# Altium PCB phoenix-c1.PcbDoc (part 2 of 3)
Units mm, origin at the board's own origin, x right, y up, seen from the top; angles counter-clockwise.
Board outline 40 x 40 mm, 4 copper layers (Top Layer, Layer 1, Layer 2, Bottom Layer), stack 1.58 mm thick; 71 components, 54 nets, 294 pads, 188 vias.
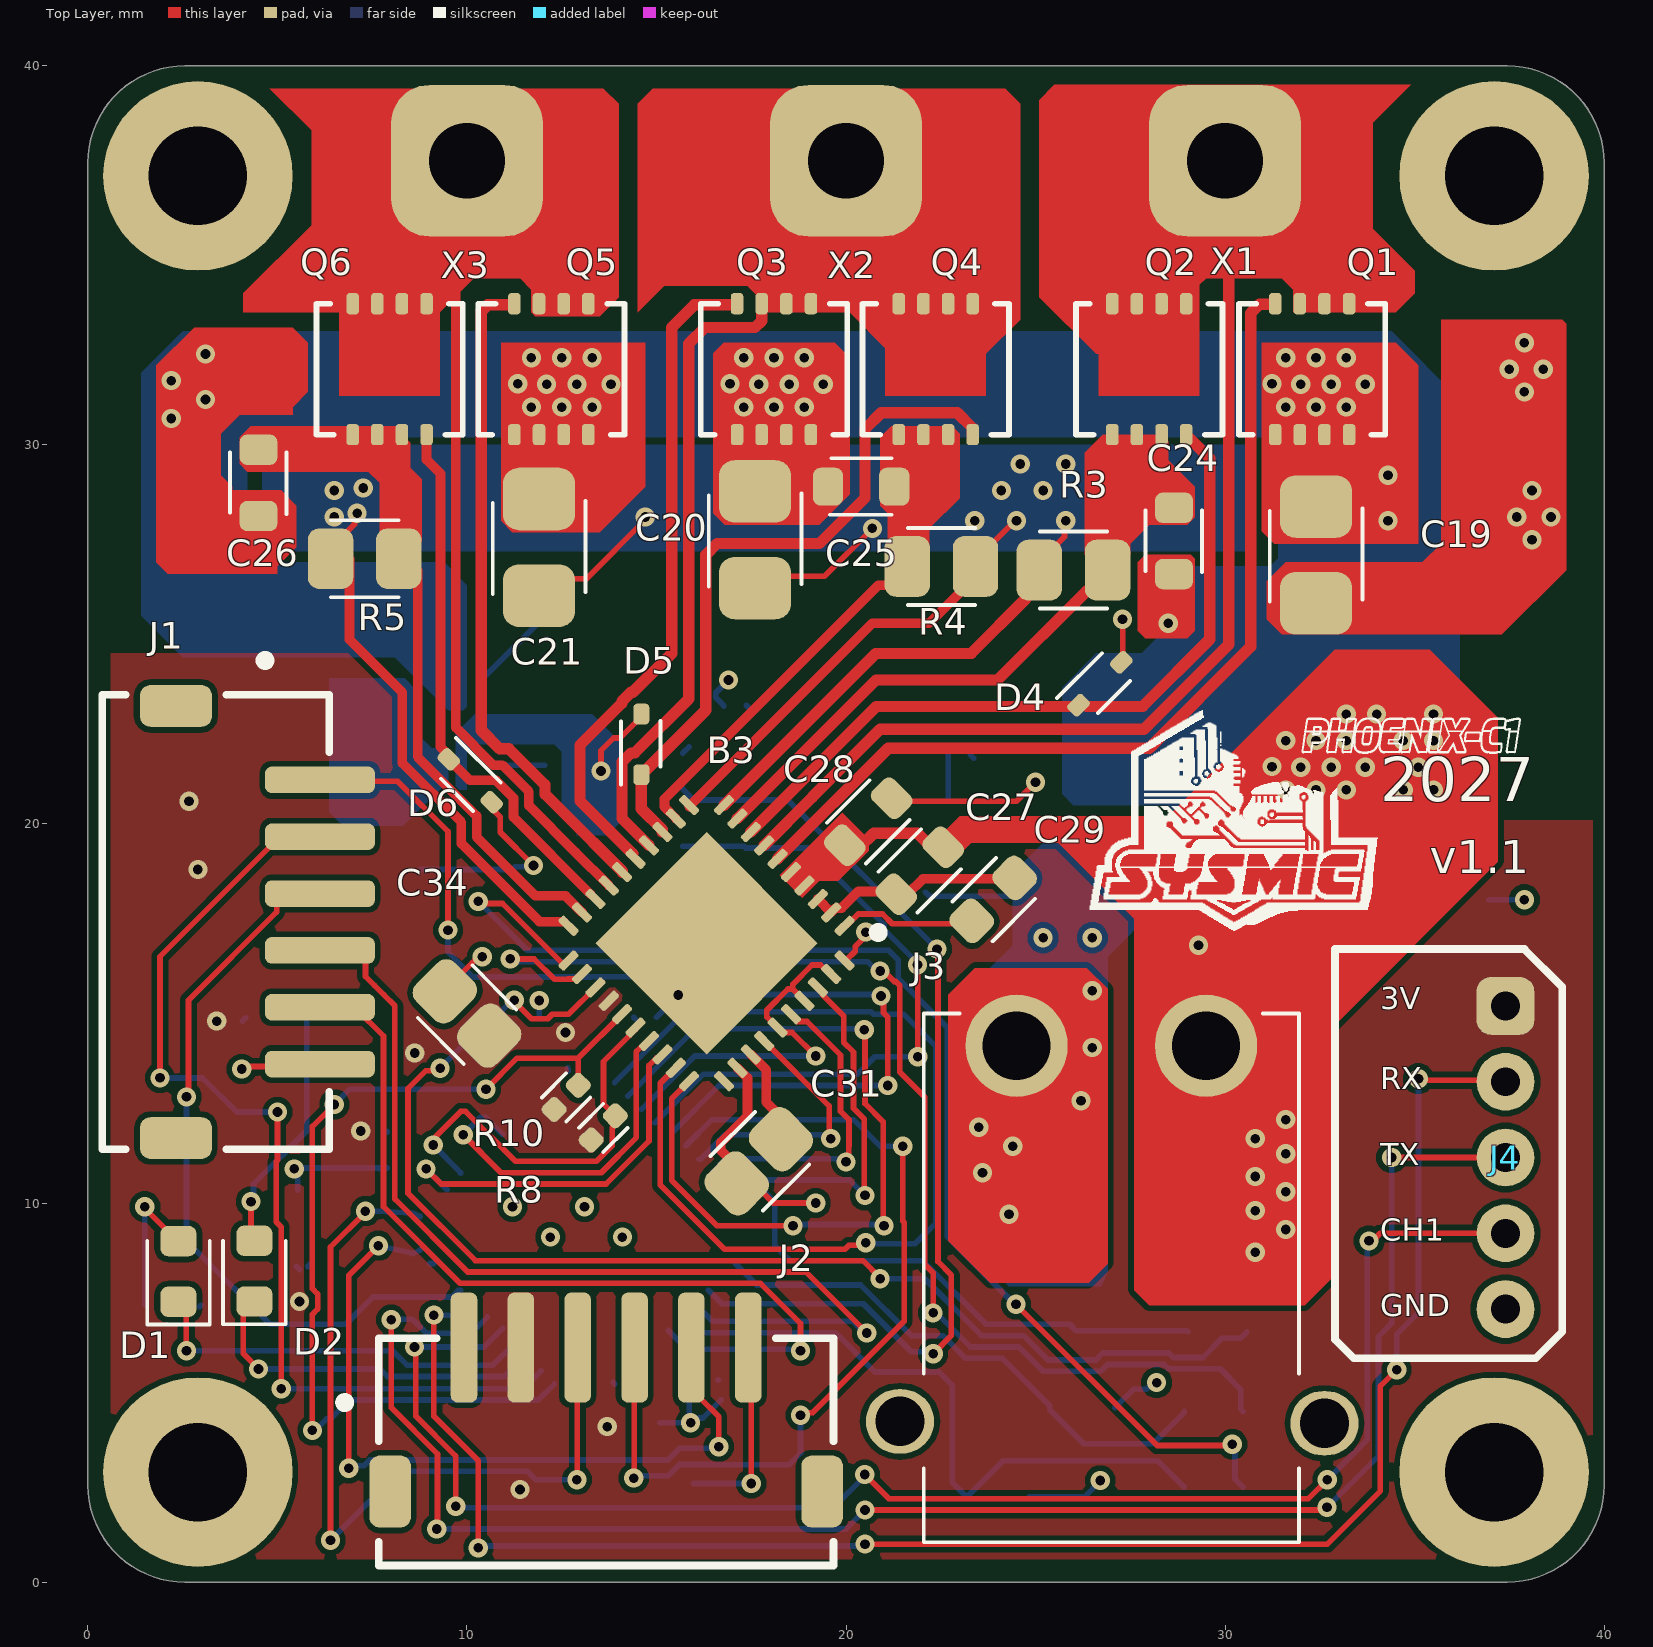
[diagram p0: Top Layer view]

## Part data (continued)
D1 D2: "APT1608SURCK Red Led, 630 Nm 1608 (0603) Clear, Rectangle Lens SMD Package", .Case/Package=0603, Case Code (Metric)=1608, Color=Red, Forward Current=30mA, Forward Voltage=1.95V, Lens Color=Clear, Manufacturer=Kingbright, Max Junction Temperature (Tj)=115°C, Max Operating Temperature=85°C, Min Operating Temperature=-40°C, Power Dissipation=75mW, Reverse Voltage=5V, Supplier Part Number=604-APT1608SURCK, Test Current=20mA, Case Code (Imperial)=0603, Case/Package=0603, Category=LEDs, ComponentLink1Description=https://datasheet.octopart.com:443/APT1608SURCK-Kingbright-datasheet-180517304.pdf?src-supplier=IHS, ComponentLink1URL=https://datasheet.octopart.com:443/APT1608SURCK-Kingbright-datasheet-180517304.pdf?src-supplier=IHS, ComponentLink2Description=https://datasheet.octopart.com:443/APT1608SURCK-Kingbright-datasheet-158492.pdf?src-supplier=IHS, ComponentLink2URL=https://datasheet.octopart.com:443/APT1608SURCK-Kingbright-datasheet-158492.pdf?src-supplier=IHS, ComponentLink3Description=https://datasheet.octopart.com:443/APT1608SURCK-Kingbright-datasheet-134530437.pdf?src-supplier=Upverter, ComponentLink3URL=https://datasheet.octopart.com:443/APT1608SURCK-Kingbright-datasheet-134530437.pdf?src-supplier=Upverter, ComponentLink4Description=https://datasheet.octopart.com:443/APT1608SURCK-Kingbright-datasheet-8331631.pdf?src-supplier=Sager+Electronics, ComponentLink4URL=https://datasheet.octopart.com:443/APT1608SURCK-Kingbright-datasheet-8331631.pdf?src-supplier=Sager+Electronics, ComponentLink5Description=https://datasheet.octopart.com:443/APT1608SURCK-Kingbright-datasheet-9964258.pdf?src-supplier=RS+(Formerly+Allied+Electronics), ComponentLink5URL=https://datasheet.octopart.com:443/APT1608SURCK-Kingbright-datasheet-9964258.pdf?src-supplier=RS+(Formerly+Allied+Electronics), Contact Plating=Gold, Dominant Wavelength=630nm, Height=750µm, Illumination Color=Red, Lead Free="Lead Free", Length=1.6mm, Lens Style="Clear, Flat", Lifecycle Status=Production, Luminous Intensity=150mcd, Manufacturer Part Number=APT1608SURCK, Mounting Technology="Surface Mount", Number of Circuits=1, Number of LEDs=1, Number of Terminals=2, Packaging="Tape & Reel (TR)", Peak Wavelength=650nm, Pins=2, Pricing="1=0,2, 10=0,136, 50=0,136, 100=0,091, 1000=0,067, 10000=0,049 (USD)", REACH SVHC=Yes, RoHS=Compliant, Schedule B="8541402000, 8541402000|8541402000, 8541402000|8541402000|8541402000, 8541402000|8541402000|8541402000|8541402000", Shape=Rectangular, Stock=38283, Supplier=Mouser, Supplier 1=Mouser, Supplier Part Number 1=604-APT1608SURCK, Terminal Pitch=1.65mm, Viewing Angle=120°, Wavelength=630nm, Width=800µm
D3: "Trans Voltage Suppressor Diode, 600W, 48V V(RWM), Unidirectional, 1 Element, Silicon, DO-214AA", .Case/Package=SMB, Breakdown Voltage=56.1V, Clamping Voltage=76.3V, Manufacturer=Vishay, Max Breakdown Voltage=58.1V, Max Operating Temperature=150°C, Max Power Dissipation=1W, Min Breakdown Voltage=54.1V, Min Operating Temperature=-55°C, Peak Pulse Current=7.9A, Peak Pulse Power=600W, Power Line Protection=No, Reverse Standoff Voltage=48V, Supplier Part Number=78-SMBJ48D-M3I, Case/Package=SMB, Category="TVS Diodes", China RoHS=Non-Compliant, ComponentLink1Description=https://datasheet.octopart.com:443/SMBJ48D-M3-I-Vishay-datasheet-168801400.pdf?src-supplier=IHS, ComponentLink1URL=https://datasheet.octopart.com:443/SMBJ48D-M3-I-Vishay-datasheet-168801400.pdf?src-supplier=IHS, ComponentLink2Description=https://datasheet.octopart.com:443/SMBJ48D-M3-I-Vishay-datasheet-141892618.pdf?src-supplier=Future+Electronics, ComponentLink2URL=https://datasheet.octopart.com:443/SMBJ48D-M3-I-Vishay-datasheet-141892618.pdf?src-supplier=Future+Electronics, ComponentLink3Description=http://sigma.octopart.com:80/rohs_statement/Vishay-company-15.pdf?src-supplier=Compliance+Statements, ComponentLink3URL=http://sigma.octopart.com:80/rohs_statement/Vishay-company-15.pdf?src-supplier=Compliance+Statements, Composition=Zener, Lifecycle Status=Production, Manufacturer Part Number=SMBJ48D-M3/I, Mounting Technology="Surface Mount", Number of Elements=1, Number of Terminals=2, Number of Unidirectional Channels=1, Packaging="Tape & Reel (TR)", Polarity=Unidirectional, Pricing="1=0,34, 10=0,24, 50=0,24, 100=0,091, 1000=0,091, 10000=0,073 (USD)", REACH SVHC=No, RoHS=Compliant, Stock=7114, Supplier=Mouser, Supplier 1=Mouser, Supplier Part Number 1=78-SMBJ48D-M3I
D4 D5 D6: "Low Capacitance Small Signal 200 mA 1 V Schottky Diode Surface Mount - SOD-523", .Case/Package=#NAME?, Average Rectified Current=200mA, Forward Voltage=450mV, Manufacturer=STMicroelectronics, Max Forward Surge Current (Ifsm)=1A, Max Junction Temperature (Tj)=150°C, Max Repetitive Reverse Voltage (Vrrm)=100V, Max Reverse Leakage Current=100nA, Min Operating Temperature=-65°C, Supplier Part Number=511-BAT41KFILM, Category="Schottky Diodes", China RoHS=Compliant, ComponentLink1Description=https://datasheet.octopart.com:443/BAT41KFILM-STMicroelectronics-datasheet-12514395.pdf?src-supplier=Upverter, ComponentLink1URL=https://datasheet.octopart.com:443/BAT41KFILM-STMicroelectronics-datasheet-12514395.pdf?src-supplier=Upverter, ComponentLink2Description=https://datasheet.octopart.com:443/BAT41KFILM-STMicroelectronics-datasheet-8379388.pdf?src-supplier=element14+APAC, ComponentLink2URL=https://datasheet.octopart.com:443/BAT41KFILM-STMicroelectronics-datasheet-8379388.pdf?src-supplier=element14+APAC, ComponentLink3Description=https://datasheet.octopart.com:443/BAT41KFILM-STMicroelectronics-datasheet-165583346.pdf?src-supplier=Newark, ComponentLink3URL=https://datasheet.octopart.com:443/BAT41KFILM-STMicroelectronics-datasheet-165583346.pdf?src-supplier=Newark, ComponentLink4Description=https://datasheet.octopart.com:443/BAT41KFILM-STMicroelectronics-datasheet-109502.pdf?src-supplier=Nu+Horizons, ComponentLink4URL=https://datasheet.octopart.com:443/BAT41KFILM-STMicroelectronics-datasheet-109502.pdf?src-supplier=Nu+Horizons, Contact Plating=Tin, Current Rating=200mA, Element Configuration=Single, Forward Current=200mA, Height=700µm, Lead Free="Lead Free", Length=1.3mm, Lifecycle Status=Production, Manufacturer Part Number=BAT41KFILM, Max Operating Temperature=150°C, Max Output current=200mA, Max Reverse Voltage (DC)=100V, Max Surge Current=1A, Mounting Technology="Surface Mount", Number of Elements=1, Number of Terminals=2, Output Current=200mA, Packaging="Tape and Reel", Peak Non-Repetitive Surge Current=1A, Peak Reverse Current=100nA, Pins=2, Polarity=Standard, Pricing="1=0,34, 10=0,206, 50=0,206, 100=0,129, 1000=0,085, 10000=0,054 (USD)", Radiation Hardening=No, REACH SVHC=Yes, Reverse Standoff Voltage=100V, RoHS=Compliant, Schedule B="8541100070, 8541100070|8541100070|8541100070|8541100070|8541100070", Stock=54328, Supplier=Mouser, Supplier 1=Mouser, Supplier Part Number 1=511-BAT41KFILM, Voltage Rating (DC)=100V, Width=900µm
J1 J2: library part CMP-17439-000151-1, "CONN HEADER SMD R/A 6POS 1.5MM", Color=Natural, Contact Resistance=30mR, Current Rating=1A, Flammability Rating="UL94 V-0", Housing Color=Beige, Max Operating Temperature=85°C, Max Voltage Rating (AC)=50V, Min Operating Temperature=-25°C, Supplier Part Number 1=306-S6BZRSM4ATFLFSN, Connector Type=Header, Contact Finish - Mating=TIN, Contact Material=Brass, Contact Plating=Copper, Contact Shape=Circular, Contact Type="Male Pin", Depth=6.5mm, Fastening Type=Detent, Gender=Male, Height=7.2mm, Housing Material=Polyamide, Insulation Color=Natural, Insulation Material=Nylon, Lead Free="Lead Free", Length=12mm, Max Current Rating=1A, Max Voltage Rating (DC)=50V, Mount="Surface Mount", Number of Contacts=6, Number of Positions=6, Number of Rows=1, Orientation="Right Angle", Packaging="Tape and Reel", Pitch=1.5mm, Series=ZH, Supplier 1=Mouser, Termination=Solder, Voltage Rating=50V, Width=3.5mm
J3: "30A Low Temperature Rise Fire Retardant Plug", Manufacturer_Name=Amass, Datasheet Link=https://www.tme.eu/sl/Document/ce4077e36b79046da520ca73227e15de/XT30PW%20SPEC.pdf, Geometry.Height=5mm, Manufacturer_Part_Number=XT30PW-M
L1: library part LPS4018-333MRC, "General Purpose Inductor, 33uH, 20%, 1 Element, Ferrite-Core, SMD, 1515", .Max DC Current=1.85A, .Value=33µH, Case Code (Imperial)=1210, Case Code (Metric)=3225, Case/Package=SMD/SMT, Current Rating=260mA, DC Resistance (DCR)=75mΩ, Inductance Tolerance=20%, Manufacturer=EPCOS, Manufacturer Lifecycle Status=PRODUCTION, Max Operating Temperature=150°C, Max Saturation Current=450mA, Max Temperature Rise Current=600mA, Min Operating Temperature=-55°C, Saturation Current=2.1A, Self Resonant Frequency=60MHz, Supplier Part Number=871-B82464P4333M, Supplier Part Number 1=994-LPS4018-333MRC, Temperature Rise Current=650mA, Test Frequency=100kHz, .RMS Current (Irms)=1.85A, Category="Fixed Inductors", ComponentLink1Description=https://datasheet.octopart.com:443/B82464P4333M000-EPCOS-datasheet-155394167.pdf?src-supplier=IHS, ComponentLink1URL=https://datasheet.octopart.com:443/B82464P4333M000-EPCOS-datasheet-155394167.pdf?src-supplier=IHS, ComponentLink2Description=https://datasheet.octopart.com:443/B82464P4333M000-EPCOS-datasheet-13705212.pdf?src-supplier=EPCOS, ComponentLink2URL=https://datasheet.octopart.com:443/B82464P4333M000-EPCOS-datasheet-13705212.pdf?src-supplier=EPCOS, ComponentLink3Description=https://datasheet.octopart.com:443/B82464P4333M000-EPCOS-datasheet-66576979.pdf?src-supplier=Newark, ComponentLink3URL=https://datasheet.octopart.com:443/B82464P4333M000-EPCOS-datasheet-66576979.pdf?src-supplier=Newark, ComponentLink4Description=https://datasheet.octopart.com:443/B82464P4333M000-EPCOS-datasheet-34142370.pdf?src-supplier=Newark, ComponentLink4URL=https://datasheet.octopart.com:443/B82464P4333M000-EPCOS-datasheet-34142370.pdf?src-supplier=Newark, ComponentLink5Description=https://datasheet.octopart.com:443/B82464P4333M000-EPCOS-datasheet-11522271.pdf?src-supplier=element14+APAC, ComponentLink5URL=https://datasheet.octopart.com:443/B82464P4333M000-EPCOS-datasheet-11522271.pdf?src-supplier=element14+APAC, ComponentLink6Description=https://datasheet.octopart.com:443/NLV32T-3R3J-EF-TDK-datasheet-181268619.pdf?src-supplier=IHS, ComponentLink6URL=https://datasheet.octopart.com:443/NLV32T-3R3J-EF-TDK-datasheet-181268619.pdf?src-supplier=IHS, ComponentLink7Description=https://datasheet.octopart.com:443/NLV32T-3R3J-EF-TDK-datasheet-155380433.pdf?src-supplier=TDK, ComponentLink7URL=https://datasheet.octopart.com:443/NLV32T-3R3J-EF-TDK-datasheet-155380433.pdf?src-supplier=TDK, ComponentLink8Description=https://datasheet.octopart.com:443/NLV32T-3R3J-EF-TDK-datasheet-97126320.pdf?src-supplier=Newark, ComponentLink8URL=https://datasheet.octopart.com:443/NLV32T-3R3J-EF-TDK-datasheet-97126320.pdf?src-supplier=Newark, ComponentLink9Description=https://datasheet.octopart.com:443/NLV32T-3R3J-EF-TDK-datasheet-81471259.pdf?src-supplier=Newark, ComponentLink9URL=https://datasheet.octopart.com:443/NLV32T-3R3J-EF-TDK-datasheet-81471259.pdf?src-supplier=Newark, ComponentLink10Description=https://datasheet.octopart.com:443/NLV32T-3R3J-EF-TDK-datasheet-136874827.pdf?src-supplier=TME, ComponentLink10URL=https://datasheet.octopart.com:443/NLV32T-3R3J-EF-TDK-datasheet-136874827.pdf?src-supplier=TME, ComponentLink11Description=https://datasheet.octopart.com:443/NLV32T-3R3J-EF-TDK-datasheet-61115007.pdf?src-supplier=Future+Electronics, ComponentLink11URL=https://datasheet.octopart.com:443/NLV32T-3R3J-EF-TDK-datasheet-61115007.pdf?src-supplier=Future+Electronics, ComponentLink12Description=https://datasheet.octopart.com:443/MBKK1608T3R3M-Taiyo-Yuden-datasheet-181265470.pdf?src-supplier=IHS, ComponentLink12URL=https://datasheet.octopart.com:443/MBKK1608T3R3M-Taiyo-Yuden-datasheet-181265470.pdf?src-supplier=IHS, ComponentLink13Description=https://datasheet.octopart.com:443/MBKK1608T3R3M-Taiyo-Yuden-datasheet-154809596.pdf?src-supplier=Master+Electronics, ComponentLink13URL=https://datasheet.octopart.com:443/MBKK1608T3R3M-Taiyo-Yuden-datasheet-154809596.pdf?src-supplier=Master+Electronics, ComponentLink14Description=https://datasheet.octopart.com:443/MBKK1608T3R3M-Taiyo-Yuden-datasheet-168245478.pdf?src-supplier=Future+Electronics, ComponentLink14URL=https://datasheet.octopart.com:443/MBKK1608T3R3M-Taiyo-Yuden-datasheet-168245478.pdf?src-supplier=Future+Electronics, ComponentLink15Description=https://datasheet.octopart.com:443/MBKK1608T3R3M-Taiyo-Yuden-datasheet-140707427.pdf?src-supplier=Taiyo+Yuden+SCT, ComponentLink15URL=https://datasheet.octopart.com:443/MBKK1608T3R3M-Taiyo-Yuden-datasheet-140707427.pdf?src-supplier=Taiyo+Yuden+SCT, ComponentLink16Description=https://datasheet.octopart.com:443/LPS4018-333MRC-Coilcraft-datasheet-178522552.pdf?src-supplier=IHS, ComponentLink16URL=https://datasheet.octopart.com:443/LPS4018-333MRC-Coilcraft-datasheet-178522552.pdf?src-supplier=IHS, ComponentLink17Description=https://datasheet.octopart.com:443/LPS4018-333MRC-Coilcraft-datasheet-10791166.pdf?src-supplier=Coilcraft+Direct, ComponentLink17URL=https://datasheet.octopart.com:443/LPS4018-333MRC-Coilcraft-datasheet-10791166.pdf?src-supplier=Coilcraft+Direct, Composition=Wirewound, Contact Plating=Tin, Core Material=Ferrite, DC Current=1.85A, Depth=10.4mm, Height=4.8mm, Height - Seated (Max)=2.3876mm, Lead Free="Lead Free", Length=10.4mm, Lifecycle Status=Production, Manufacturer Part Number=B82464P4333M000, Max Current Rating=1.85A, Max DC Current=1.85A, Max Length=10.4mm, Max Width=10.4mm, Military Standard=Not, Min Length=3mm, Min Width=2.3mm, Mounting Technology="Surface Mount", Number of Circuits=1, Number of Terminals=2, Packaging="Tape & Reel (TR)", Pricing="1=1,59, 10=1,31, 50=1,14, 100=1,08, 1000=0,885, 10000=0,775 (USD)", Q Factor=30, REACH SVHC=Yes, RMS Current (Irms)=1.85A, RoHS=Compliant, Schedule B="8504500000, 8504500000|8504500000|8504500000|8504500000|8504500000", Shielding=Yes, Stock=942, Supplier=Mouser, Supplier 1=Mouser, Termination=SMD/SMT, Tolerance=20%, Weight=50.008559mg, Width=10.4mm
Q1 Q2 Q3 Q4 Q5 Q6: "Power MOSFET, N Channel, 80 V, 38 A, 0.0147 ohm, TSON, Surface Mount", Manufacturer_Name="Toshiba Electronic Devices & Storage Corp.", Supplier Part Number 1=757-TPN19008QM,LQ, Copyright="Copyright (C) 2025 Ultra Librarian. All rights reserved.", Manufacturer_Part_Number=TPN19008QM,LQ, RefDes=RefDes, Supplier 1=Mouser, Type=Type
R1 R2: library part RT0603BRD07560RL, "Res Thin Film 0603 560 Ohm 0.1% 0.1W(1/10W) ±25ppm/C Pad SMD T/R", .Case/Package=0603, .Tolerance=0.1%, Manufacturer="Yageo Group", Max Operating Temperature=155°C, Max Power Dissipation=100mW, Min Operating Temperature=-55°C, Supplier Part Number=603-RT0603BRD07560RL, Temperature Coefficient=25ppm/°C, Voltage Rating=75V, Voltage Rating (DC)=50V, Case Code (Imperial)=0603, Case/Package=0603, Category="Chip SMD Resistors", China RoHS=Non-Compliant, ComponentLink1Description=https://datasheet.octopart.com:443/RT0603BRD07560RL-Yageo-datasheet-176402239.pdf?src-supplier=Newark, ComponentLink1URL=https://datasheet.octopart.com:443/RT0603BRD07560RL-Yageo-datasheet-176402239.pdf?src-supplier=Newark, ComponentLink2Description=https://datasheet.octopart.com:443/RT0603BRD07560RL-Yageo-datasheet-96443642.pdf?src-supplier=Upverter, ComponentLink2URL=https://datasheet.octopart.com:443/RT0603BRD07560RL-Yageo-datasheet-96443642.pdf?src-supplier=Upverter, ComponentLink3Description=https://datasheet.octopart.com:443/RT0603BRD07560RL-Yageo-datasheet-169971040.pdf?src-supplier=Future+Electronics, ComponentLink3URL=https://datasheet.octopart.com:443/RT0603BRD07560RL-Yageo-datasheet-169971040.pdf?src-supplier=Future+Electronics, ComponentLink4Description=https://datasheet.octopart.com:443/RT0603BRD07560RL-Yageo-datasheet-166250672.pdf?src-supplier=Future+Electronics, ComponentLink4URL=https://datasheet.octopart.com:443/RT0603BRD07560RL-Yageo-datasheet-166250672.pdf?src-supplier=Future+Electronics, ComponentLink5Description=https://datasheet.octopart.com:443/RT0603BRD07560RL-Yageo-datasheet-137700930.pdf?src-supplier=Future+Electronics, ComponentLink5URL=https://datasheet.octopart.com:443/RT0603BRD07560RL-Yageo-datasheet-137700930.pdf?src-supplier=Future+Electronics, ComponentLink6Description=https://datasheet.octopart.com:443/RT0603BRD07560RL-Yageo-Group-datasheet-141265893.pdf?src-supplier=ODG+(Origin+Data+Global), ComponentLink6URL=https://datasheet.octopart.com:443/RT0603BRD07560RL-Yageo-Group-datasheet-141265893.pdf?src-supplier=ODG+(Origin+Data+Global), ComponentLink7Description=https://datasheet.octopart.com:443/RT0603BRD07560RL-Yageo-datasheet-10915759.pdf?src-supplier=_legacy+Avnet, ComponentLink7URL=https://datasheet.octopart.com:443/RT0603BRD07560RL-Yageo-datasheet-10915759.pdf?src-supplier=_legacy+Avnet, ComponentLink8Description=https://datasheet.octopart.com/RT0603BRD07560RL-Yageo-datasheet-86813807.pdf, ComponentLink8URL=https://datasheet.octopart.com/RT0603BRD07560RL-Yageo-datasheet-86813807.pdf, ComponentLink9Description=http://sigma.octopart.com:80/rohs_statement/Yageo-company-2.pdf?src-supplier=Compliance+Statements, ComponentLink9URL=http://sigma.octopart.com:80/rohs_statement/Yageo-company-2.pdf?src-supplier=Compliance+Statements, ComponentLink10Description=http://sigma.octopart.com:80/conflict_mineral_statement/Yageo-company-3.pdf?src-supplier=Compliance+Statements, ComponentLink10URL=http://sigma.octopart.com:80/conflict_mineral_statement/Yageo-company-3.pdf?src-supplier=Compliance+Statements, Composition="Thin Film", Contact Plating=Tin, Depth=800µm, Features="Moisture Resistant", Height=450µm, Lead Free="Lead Free", Length=1.6mm, Lifecycle Status=Production, Manufacturer Part Number=RT0603BRD07560RL, Military Standard=Not, Mounting Technology="Surface Mount", Number of Terminals=2, Number of Terminations=2, Power Dissipation=100mW, Power Rating=100mW, Pricing="1=0,1, 10=0,053, 50=0,053, 100=0,046, 1000=0,042, 10000=0,039 (USD)", Radiation Hardening=No, REACH SVHC=Yes, RoHS=Compliant, Schedule B="8533210045, 8533210045|8533210045, 8533210045|8533210045|8533210045, 8533210045|8533210045|8533210045|8533210045", Stock=19960, Supplier=Mouser, Supplier 1=Mouser, Supplier Part Number 1=603-RT0603BRD07560RL, Termination=SMD/SMT, Tolerance=0.1%, Weight=2.012816mg, Width=800µm, Working Voltage=75V
R3 R4 R5: library part CSSH0805FT2L00, "Res Metal Alloy 0805 0.002 Ohm 1% 1W ±75ppm/C Pad SMD T/R Automotive AEC-Q200", .Case/Package=#NAME?, .Tolerance=1%, Manufacturer="Stackpole Electronics", Max Operating Temperature=170°C, Min Operating Temperature=-55°C, Power Dissipation=1W, Supplier Part Number=708-CSSH0805FT2L00, Temperature Coefficient=75ppm/°C, Working Voltage=44.7mV, Category="Chip SMD Resistors", ComponentLink1Description=https://datasheet.octopart.com:443/CSSH0805FT2L00-Stackpole-Electronics-datasheet-182147922.pdf?src-supplier=IHS, ComponentLink1URL=https://datasheet.octopart.com:443/CSSH0805FT2L00-Stackpole-Electronics-datasheet-182147922.pdf?src-supplier=IHS, ComponentLink2Description=https://datasheet.octopart.com:443/CSSH0805FT2L00-Stackpole-Electronics-datasheet-141193806.pdf?src-supplier=Stackpole+Electronics, ComponentLink2URL=https://datasheet.octopart.com:443/CSSH0805FT2L00-Stackpole-Electronics-datasheet-141193806.pdf?src-supplier=Stackpole+Electronics, ComponentLink3Description=https://datasheet.octopart.com:443/CSSH0805FT2L00-Stackpole-Electronics-datasheet-141158304.pdf?src-supplier=Stackpole+Electronics, ComponentLink3URL=https://datasheet.octopart.com:443/CSSH0805FT2L00-Stackpole-Electronics-datasheet-141158304.pdf?src-supplier=Stackpole+Electronics, ComponentLink4Description=https://datasheet.octopart.com:443/CSSH0805FT2L00-Stackpole-Electronics-datasheet-101746695.pdf?src-supplier=Future+Electronics, ComponentLink4URL=https://datasheet.octopart.com:443/CSSH0805FT2L00-Stackpole-Electronics-datasheet-101746695.pdf?src-supplier=Future+Electronics, ComponentLink5Description=http://sigma.octopart.com:80/141158211/reach_statement/Stackpole-Electronics-CSSH0805FT2L00.pdf?src-supplier=Compliance+Statements, ComponentLink5URL=http://sigma.octopart.com:80/141158211/reach_statement/Stackpole-Electronics-CSSH0805FT2L00.pdf?src-supplier=Compliance+Statements, ComponentLink6Description=http://sigma.octopart.com:80/141158212/rohs_statement/Stackpole-Electronics-CSSH0805FT2L00.pdf?src-supplier=Compliance+Statements, ComponentLink6URL=http://sigma.octopart.com:80/141158212/rohs_statement/Stackpole-Electronics-CSSH0805FT2L00.pdf?src-supplier=Compliance+Statements, Height=350µm, Lifecycle Status=Production, Manufacturer Part Number=CSSH0805FT2L00, Mounting Technology="Surface Mount", Number of Terminals=2, Pricing="1=0,6, 10=0,385, 50=0,29, 100=0,261, 1000=0,188, 10000=0,144 (USD)", REACH SVHC=Yes, RoHS=Compliant, Schedule B="8533210045, 8533210045|8533210045|8533210045|8533210045|8533210045", Stock=6684, Supplier=Mouser, Supplier 1=Mouser, Supplier Part Number 1=708-CSSH0805FT2L00, Tolerance=1%, Width=1.3mm
R6 R7 R9: library part RC0603JR-0722RL, "100Mw Thick Film Resistors 100Ppm/ 5% 22 0603 Chip Resistor Surface Mount Rohs", .Case/Package=0603, .Tolerance=5%, Manufacturer="Yageo Group", Max Operating Temperature=155°C, Min Operating Temperature=-55°C, Power Dissipation=100mW, Supplier Part Number=603-RC0603JR-0722RL, Temperature Coefficient=100ppm/°C, Voltage Rating=50V, Working Voltage=75V, Case Code (Imperial)=0603, Case/Package=0603, Category="Chip SMD Resistors", China RoHS=Non-Compliant, ComponentLink1Description=https://datasheet.octopart.com:443/RC0603JR-0722RL-Yageo-datasheet-175887523.pdf?src-supplier=Newark, ComponentLink1URL=https://datasheet.octopart.com:443/RC0603JR-0722RL-Yageo-datasheet-175887523.pdf?src-supplier=Newark, ComponentLink2Description=https://datasheet.octopart.com:443/RC0603JR-0722RL-Yageo-datasheet-8328172.pdf?src-supplier=Newark, ComponentLink2URL=https://datasheet.octopart.com:443/RC0603JR-0722RL-Yageo-datasheet-8328172.pdf?src-supplier=Newark, ComponentLink3Description=https://datasheet.octopart.com:443/RC0603JR-0722RL-Yageo-datasheet-34211833.pdf?src-supplier=Newark, ComponentLink3URL=https://datasheet.octopart.com:443/RC0603JR-0722RL-Yageo-datasheet-34211833.pdf?src-supplier=Newark, ComponentLink4Description=https://datasheet.octopart.com:443/RC0603JR-0722RL-Yageo-datasheet-62067350.pdf?src-supplier=element14+APAC, ComponentLink4URL=https://datasheet.octopart.com:443/RC0603JR-0722RL-Yageo-datasheet-62067350.pdf?src-supplier=element14+APAC, ComponentLink5Description=https://datasheet.octopart.com:443/RC0603JR-0722RL-Yageo-datasheet-15599030.pdf?src-supplier=Seeed+Studio, ComponentLink5URL=https://datasheet.octopart.com:443/RC0603JR-0722RL-Yageo-datasheet-15599030.pdf?src-supplier=Seeed+Studio, ComponentLink6Description=https://datasheet.octopart.com:443/RC0603JR-0722RL-Yageo-Group-datasheet-176638170.pdf?src-supplier=Farnell, ComponentLink6URL=https://datasheet.octopart.com:443/RC0603JR-0722RL-Yageo-Group-datasheet-176638170.pdf?src-supplier=Farnell, ComponentLink7Description=https://datasheet.octopart.com:443/RC0603JR-0722RL-Yageo-datasheet-164759695.pdf?src-supplier=Future+Electronics, ComponentLink7URL=https://datasheet.octopart.com:443/RC0603JR-0722RL-Yageo-datasheet-164759695.pdf?src-supplier=Future+Electronics, ComponentLink8Description=https://datasheet.octopart.com:443/RC0603JR-0722RL-Yageo-datasheet-137700087.pdf?src-supplier=Future+Electronics, ComponentLink8URL=https://datasheet.octopart.com:443/RC0603JR-0722RL-Yageo-datasheet-137700087.pdf?src-supplier=Future+Electronics, ComponentLink9Description=https://datasheet.octopart.com:443/RC0603JR0722RL-Yageo-datasheet-27584510.pdf?src-supplier=Future+Electronics, ComponentLink9URL=https://datasheet.octopart.com:443/RC0603JR0722RL-Yageo-datasheet-27584510.pdf?src-supplier=Future+Electronics, ComponentLink10Description=https://datasheet.octopart.com:443/RC0603JR-0722RL-Yageo-datasheet-12596169.pdf?src-supplier=Future+Electronics, ComponentLink10URL=https://datasheet.octopart.com:443/RC0603JR-0722RL-Yageo-datasheet-12596169.pdf?src-supplier=Future+Electronics, ComponentLink11Description=https://datasheet.octopart.com:443/RC0603JR-0722RL-Yageo-datasheet-8324193.pdf?src-supplier=Future+Electronics, ComponentLink11URL=https://datasheet.octopart.com:443/RC0603JR-0722RL-Yageo-datasheet-8324193.pdf?src-supplier=Future+Electronics, ComponentLink12Description=https://datasheet.octopart.com/RC0603JR-0722RL-Yageo-datasheet-73766026.pdf, ComponentLink12URL=https://datasheet.octopart.com/RC0603JR-0722RL-Yageo-datasheet-73766026.pdf, ComponentLink13Description=https://datasheet.octopart.com:443/RC0603JR-0722RL-Yageo-datasheet-118562.pdf?src-supplier=DigiKey, ComponentLink13URL=https://datasheet.octopart.com:443/RC0603JR-0722RL-Yageo-datasheet-118562.pdf?src-supplier=DigiKey, ComponentLink14Description=http://sigma.octopart.com:80/conflict_mineral_statement/Yageo-company-3.pdf?src-supplier=Compliance+Statements, ComponentLink14URL=http://sigma.octopart.com:80/conflict_mineral_statement/Yageo-company-3.pdf?src-supplier=Compliance+Statements, ComponentLink15Description=http://sigma.octopart.com:80/rohs_statement/Yageo-company-2.pdf?src-supplier=Compliance+Statements, ComponentLink15URL=http://sigma.octopart.com:80/rohs_statement/Yageo-company-2.pdf?src-supplier=Compliance+Statements, Composition="Thick Film", Depth=800µm, Height=450µm, Lead Free="Lead Free", Length=1.6mm, Lifecycle Status=Production, Manufacturer Part Number=RC0603JR-0722RL, Military Standard=Not, Mounting Technology="Surface Mount", Number of Terminals=2, Packaging="Tape & Reel", Pins=2, Power Rating=100mW, Pricing="1=0,1, 10=0,005, 50=0,005, 100=0,005, 1000=0,005, 10000=0,001 (USD)", REACH SVHC=Yes, RoHS=Compliant, Schedule B="8533210045, 8533210045|8533210045, 8533210045|8533210045|8533210045, 8533210045|8533210045|8533210045|8533210045", Stock=2700649, Supplier=Mouser, Supplier 1=Mouser, Supplier Part Number 1=603-RC0603JR-0722RL, Termination=SMD/SMT, Tolerance=5%, Voltage Rating (AC)=50V, Voltage Rating (DC)=50V, Width=800µm
R8 R10 R11 R12: library part AF0402JR-072KL, "Anti-Sulfurated Chip Resistor Thick Film 0402 2kOhm 5% Paper T/R", .Case/Package=0402, .Tolerance=5%, Manufacturer="Yageo Group", Max Operating Temperature=155°C, Max Power Dissipation=63mW, Min Operating Temperature=-55°C, Power Dissipation=62.5mW, Supplier Part Number=603-AF0402JR-072KL, Temperature Coefficient=100ppm/°C, Voltage Rating=50V, Case/Package=0402, Category="Chip SMD Resistors", China RoHS=Non-Compliant, ComponentLink1Description=https://datasheet.octopart.com:443/AF0402JR-072KL-Yageo-datasheet-182189395.pdf?src-supplier=IHS, ComponentLink1URL=https://datasheet.octopart.com:443/AF0402JR-072KL-Yageo-datasheet-182189395.pdf?src-supplier=IHS, ComponentLink2Description=https://datasheet.octopart.com:443/AF0402JR-072KL-Yageo-datasheet-153645569.pdf?src-supplier=Upverter, ComponentLink2URL=https://datasheet.octopart.com:443/AF0402JR-072KL-Yageo-datasheet-153645569.pdf?src-supplier=Upverter, ComponentLink3Description=https://sigma.octopart.com:443/138820526/technical_drawing/Yageo-AF0402JR-072KL.pdf?src-supplier=Upverter, ComponentLink3URL=https://sigma.octopart.com:443/138820526/technical_drawing/Yageo-AF0402JR-072KL.pdf?src-supplier=Upverter, ComponentLink4Description=https://datasheet.octopart.com/AF0402JR-072KL-Yageo-datasheet-68296209.pdf, ComponentLink4URL=https://datasheet.octopart.com/AF0402JR-072KL-Yageo-datasheet-68296209.pdf, ComponentLink5Description=https://datasheet.octopart.com:443/AF0402JR-072KL-Yageo-datasheet-164730775.pdf?src-supplier=Future+Electronics, ComponentLink5URL=https://datasheet.octopart.com:443/AF0402JR-072KL-Yageo-datasheet-164730775.pdf?src-supplier=Future+Electronics, ComponentLink6Description=https://datasheet.octopart.com:443/AF0402JR-072KL-Yageo-datasheet-137481464.pdf?src-supplier=Future+Electronics, ComponentLink6URL=https://datasheet.octopart.com:443/AF0402JR-072KL-Yageo-datasheet-137481464.pdf?src-supplier=Future+Electronics, ComponentLink7Description=https://datasheet.octopart.com:443/AF0402JR-072KL-Yageo-datasheet-27714391.pdf?src-supplier=Future+Electronics, ComponentLink7URL=https://datasheet.octopart.com:443/AF0402JR-072KL-Yageo-datasheet-27714391.pdf?src-supplier=Future+Electronics, ComponentLink8Description=http://sigma.octopart.com:80/rohs_statement/Yageo-company-2.pdf?src-supplier=Compliance+Statements, ComponentLink8URL=http://sigma.octopart.com:80/rohs_statement/Yageo-company-2.pdf?src-supplier=Compliance+Statements, ComponentLink9Description=http://sigma.octopart.com:80/conflict_mineral_statement/Yageo-company-3.pdf?src-supplier=Compliance+Statements, ComponentLink9URL=http://sigma.octopart.com:80/conflict_mineral_statement/Yageo-company-3.pdf?src-supplier=Compliance+Statements, Composition="Thick Film", Features="Anti-Sulfur, Moisture Resistant", Height=350µm, Length=990.6µm, Lifecycle Status=Production, Manufacturer Part Number=AF0402JR-072KL, Mounting Technology="Surface Mount", Number of Terminals=2, Number of Terminations=2, Packaging="Tape & Reel", Power Rating=62.5mW, Pricing="1=0,1, 10=0,007, 50=0,007, 100=0,006, 1000=0,005, 10000=0,005 (USD)", REACH SVHC=Yes, RoHS=Compliant, Stock=66785, Supplier=Mouser, Supplier 1=Mouser, Supplier Part Number 1=603-AF0402JR-072KL, Tolerance=5%, Width=500µm, Working Voltage=50V
X1 X2 X3: library part Conn_01x01, "Generic connector, single row"

## Free pads (board coordinates)
  round 5 hole 2.6: 1(2.9,2.9) 1(2.9,37.1) 1(37.1,2.9) 1(37.1,37.1)

## Via types
v1: diameter 0.508, hole 0.254, Top Layer to Bottom Layer, tented both sides, 188 vias

## Nets (pads, with @x,y where several pads share a name; then routed paths per layer and width w, separated by ;. In a path a pad name is that pad's centre, name@x,y a point inside that pad or via, vN(x,y) a via of type N, cw(c..) or ccw(c..) an arc to the next point about the centre after c; other vN are vias at no path point)
+3.3V: B1.1 B1.20 B1.21 B1.23 B1.35 B1.48 B2.4 B3.24 B4.1 B4.2 B4.8 C1.2 C2.2 C3.2 C4.2 C5.2 C6.2 C7.2 C11.2 C34.2 C35.2 J2.2 J4.1 L1.2 R1.2 R2.2 R8.1 R10.2 R11.2 R12.2 | length 3.7
  Top Layer w0.15: v1(8.621,13.958) v1@8.621,14.022 ; C34.2@10.8,14.4 C34.2@10.826,14.426 ; v1(11.4,2.442) v1@11.41,2.452 ; R10.2@12.3,12.424 R10.2@12.43,12.424 ; v1@12.574,14.526 v1(12.6,14.5) v1@12.636,14.536 ; R8.1@13.095,11.684 R8.1@13.095,11.76 ; J4.1@36.926,15.1 J4.1@37.026,15.2
  Bottom Layer w0.15: R1.2@2.95,7.268 R1.2@2.982,7.3 ; R2.2@4.075,14.8 R2.2@4.162,14.888 ; C4.2 C4.2@5.579,8.246 ; C4.2@5.8,8.325 C4.2@5.854,8.379 ; v1(7.2,11.9) v1@7.213,11.887 ; C1.2@7.888,11.887 C1.2 ; B1.35@9.016,8.405 B1.35@9.123,8.405 ; B1.48@12.658,13.531 B1.48@12.658,13.566 ; B1.48@12.664,13.485 B1.48@12.664,13.536 ; B1.23@13.856,5.262 B1.23@13.895,5.223 ; C3.2 C3.2@14.437,14.863 ; R11.2@15.694,21.872 R11.2@15.856,22.033 ; C6.2@15.768,5.374 C6.2@15.768,5.434 ; C6.2 C6.2@15.903,5.449 ; C7.2@16.625,5.326 C7.2@16.634,5.334 ; B4.8@17.267,21.872 B4.8 17.384,21.905 B4.8@17.627,22.148 ; C35.2@17.373,23.127 C35.2 ; B4.2 B4.1 ; B4.1@23.275,21.918 23.275,21.832 B4.1@23.368,21.739
  other v1: 13.7,4.1 5.579,7.4 3.4,14.8 2.9,18.8 2.665,20.6
AS5600_SCL: B1.16 B4.7 R11.1 | length 26.1
  Top Layer w0.15: v1(22.3,6.021) 22.779,6.5 22.779,8.103 22.429,8.453 22.429,16.671 v1(22.4,16.7)
  Bottom Layer w0.15: R11.1 15.694,20.923 15.982,20.635 B4.7 ; B1.16@16.37,7.697 16.724,7.344 20.454,7.344 21.721,6.077 22.244,6.077 v1(22.3,6.021) ; B4.7@17.328,20.635 18.465,20.635 v1(22.4,16.7)
AS5600_SDA: B1.5 B4.6 R12.1 | length 17.7
  Top Layer w0.15: v1(21.886,16.289) 21.896,16.279 v1(21.896,13.857)
  Bottom Layer w0.15: B1.5@14.956,12.117 16.239,13.4 20.3,13.4 20.757,13.857 v1(21.896,13.857) ; R12.1 17.3,19.417 17.352,19.365 18.981,19.365 21,17.346 21,17.217 21.886,16.331 v1(21.886,16.289)
CPL: B3.1 C29.1 | length 3.6
  Top Layer w0.15: B3.1 20.011,17.315 20.323,17.627 20.964,17.627 21.221,17.369 22.782,17.369 22.858,17.445 C29.1
CUR1: B3.23 R6.1 | length 33.6
  Top Layer w0.15: v1(9.291,13.555) 9.222,13.486 8.909,13.486 8.442,13.019 8.442,10.258 10.221,8.479 20.449,8.479 20.9,8.028 v1(20.9,8) ; v1(11.246,15.35) 11.246,15.318 11.701,14.863 12.131,14.863 12.247,14.979 12.678,14.979 B3.23
  Bottom Layer w0.15: v1(9.291,13.555) 10.775,15.039 10.881,15.039 11.192,15.35 v1(11.246,15.35) ; v1(20.9,8) 22.076,8 23.576,6.5 24.682,6.5 25.322,5.86 26.59,5.86 26.771,6.04 28.516,6.04 28.631,5.925 29.419,5.925 29.925,6.431 30.406,6.431 R6.1
CUR2: B3.22 R7.1 | length 31.5
  Top Layer w0.15: v1(11.14,16.44) 11.772,16.44 12.308,15.904 12.662,15.904 12.666,15.908 12.85,15.908 12.984,16.042 B3.22 ; v1(20.9,16.121) 20.996,16.121 21.274,15.843 21.311,15.843 21.417,15.737 21.417,13.46 22.079,12.798 22.079,8.379 22.3,8.158 22.3,7.102 v1(22.298,7.1)
  Bottom Layer w0.15: v1(11.14,16.44) 11.209,16.372 11.404,16.372 11.407,16.368 20.564,16.368 20.812,16.121 v1(20.9,16.121) ; v1(22.298,7.1) 22.386,7.1 23.286,6.2 24.558,6.2 25.198,5.56 26.714,5.56 26.895,5.74 28.392,5.74 28.507,5.625 29.875,5.625 30.413,5.087 30.413,4.562 R7.1
CUR3: B3.21 R9.1 | length 33.7
  Top Layer w0.15: v1(10.3,17.958) 10.358,17.9 10.938,17.9 12.537,16.302 12.586,16.302 B3.21 ; v1(24.485,7.326) 28.211,3.6 v1@30.2,3.6
  Bottom Layer w0.15: v1(10.3,17.958) 11.589,16.668 21.124,16.668 21.379,16.414 21.379,15.921 22.675,14.625 22.675,9.107 v1@24.491,7.291 ; v1(30.195,3.635) 30.263,3.567 30.263,2.712 R9.1
DRV8323_CS: B1.2 B3.29 | length 25.8
  Top Layer w0.15: B3.29 15.1,13.159 15.1,10.476 16.797,8.779 19.97,8.779 20.075,8.883 20.456,8.883 v1(20.524,8.952)
  Bottom Layer w0.15: B1.2@13.895,13.177 15.767,15.049 20.659,15.049 20.724,14.984 21.516,14.984 22.375,14.125 22.375,9.475 21.824,8.924 20.552,8.924 v1(20.524,8.952)
DRV8323_FAULT: B1.26 B3.25 R10.1 | length 25.1
  Top Layer w0.15: v1(5.921,4) 5.921,7.065 6.058,7.202 6.058,7.598 5.921,7.735 5.921,12.021 v1(6.5,12.6) ; v1(10.5,13) 11.323,13.823 12.936,13.823 ; R10.1 12.936,13.823 ; B3.25 12.936,13.823
  Bottom Layer w0.15: v1(5.921,4) 5.992,4 6.295,4.303 6.401,4.303 6.898,4.8 11.882,4.8 B1.26@12.305,5.223 ; v1(6.5,12.6) 6.9,13 v1(10.5,13)
DRV8323_MISO: B1.40 B3.26 R8.2 | length 10.6
  Top Layer w0.15: v1(9.109,11.53) 9.178,11.599 9.178,11.758 9.836,12.417 9.961,12.417 11.277,11.1 13.419,11.1 13.833,11.515 13.833,11.993 13.913,12.073 R8.2 13.6,12.614 13.6,13.731 14.448,14.579 B3.26
  Bottom Layer w0.15: v1(9.109,11.53) 9.109,11.527 9.83,10.806 B1.40@9.83,10.786
DRV8323_MOSI: B1.43 B3.27 | length 9.2
  Top Layer w0.15: v1(9.9,11.8) 10.9,10.8 13.543,10.8 14.47,11.727 14.47,13.995 B3.27@14.6,14.126
  Bottom Layer w0.15: v1(9.9,11.8) 10.365,12.265 10.489,12.265 B1.43
DRV8323_SCLK: B1.39 B3.28 | length 9.6
  Top Layer w0.15: v1(8.921,10.9) 9.321,10.5 13.667,10.5 14.8,11.633 14.8,13.626 B3.28@15,13.826
  Bottom Layer w0.15: v1(8.921,10.9) 8.923,10.9 9.474,10.349 B1.39@9.476,10.349
DVDD: B3.33 C31.2 | length 2.4
  Top Layer w0.254: B3.33 17.9,13.509 17.9,12.654 18.57,11.983 C31.2@18.583,11.983
FCUR1: B1.11 C30.2 R6.2 | length 14.3
  Bottom Layer w0.15: B1.11@17.077,9.995 17.184,9.995 17.488,10.3 17.848,10.3 18.121,10.027 18.121,8.879 18.527,8.473 20.696,8.473 20.702,8.479 22.021,8.479 23.7,6.8 25.903,6.8 C30.2 26.073,6.63 28.995,6.63 R6.2
FCUR2: B1.14 C32.2 R7.2 | length 14.2
  Bottom Layer w0.15: B1.14@17.077,8.405 17.645,7.837 20.386,7.837 21.723,6.5 22.561,6.5 23.161,5.9 24.125,5.9 25.375,4.65 25.375,4.6 25.375,4.55 26.275,3.65 28.1,3.65 28.925,4.475 R7.2
FCUR3: B1.18 C33.2 R9.2 | length 17.4
  Bottom Layer w0.15: B1.18@15.663,6.99 16.075,6.579 19.719,6.579 20.756,5.542 22.458,5.542 22.8,5.2 22.8,2.633 C33.2 24.137,3.196 28.229,3.196 R9.2
GHA: B3.6 Q1.4 | length 24.4
  Top Layer w0.3: B3.6 21.113,22 28,22 30.675,24.675 30.675,33.475 30.91,33.71 31.31,33.71 Q1.4 Q1.4
GHB: B3.15 Q3.4 | length 17.5
  Top Layer w0.3: B3.15@14.37,19.217 12.982,20.605 12.982,22.082 14.09,23.19 14.09,23.238 14.327,23.475 14.375,23.475 15.4,24.5 15.4,33.1 16,33.7 17.11,33.7 17.125,33.715 Q3.4
GHC: B3.16 Q5.4 | length 17.4
  Top Layer w0.3: Q5.4 11.25,33.715 11.235,33.7 10.551,33.7 10.376,33.524 10.376,22.473 10.866,21.982 11.108,21.982 12.059,21.031 12.059,20.79 12.532,20.316 14.094,18.754 B3.16
GLA: B3.8 D4.1 Q2.4 | length 20
  Top Layer w0.3: B3.8 20.799,23.1 25.992,23.1 26.003,23.088 26.088,23.088 26.18,23.18 26.265,23.18 26.345,23.1 27.827,23.1 29.6,24.873 29.6,29.648 Q2.4
GLB: B3.13 D5.1 Q4.4 | length 18.2
  Top Layer w0.3: B3.13 15.155,19.846 14.6,20.402 D5.1 16.3,23 16.3,27.1 16.6,27.4 19.3,27.4 20.5,28.6 20.5,30.424 20.928,30.852 22.933,30.852 23.327,30.458 23.327,30.288 Q4.4
GLC: B3.18 D6.1 Q6.4 | length 14.3
  Top Layer w0.254: Q6.4 8.933,29.612 9.3,29.245 9.3,22.036 9.566,21.77 D6.1@9.566,21.752 ; D6.1 10.075,21.151 10.764,21.151 11.228,20.687 11.228,20.182 B3.18@13.265,18.144
GND: B1.49 B2.7 B3.10 B3.11 B3.20 B3.32 B3.40 B3.41 B4.4 C1.1 C2.1 C3.1 C4.1 C5.1 C6.1 C7.1 C8.1 C9.1 C10.1 C11.1 C14.2 C15.2 C16.2 C17.2 C18.2 C19.2 C20.2 C21.2 C22.2 C23.2 C28.1 C30.1 C31.1 C32.1 C33.1 C34.1 C35.1 C37.2 D3.2 D4.2 D5.2 D6.2 J1.6 J2.6 J3.1 J4.5 JU1.1 R3.1 R4.1 R5.1 | length 92.3
  Top Layer w0.15: v1(4.058,13.535) 4.123,13.6 5.715,13.6 J1.6@5.728,13.613 ; R5.1@6.9,26.5 6.508,26.892 6.616,27 6.9,27 6.807,27.093 6.807,27.687 7.032,27.911 7.032,28.132 v1(7.1,28.2) ; C34.1@9.383,15.583 10.132,16.332 10.135,16.332 10.303,16.5 v1(10.4,16.5) ; D6.2 10.651,20.41 10.876,20.185 10.876,19.783 v1(11.753,18.905) ; C21.2@12.338,26.362 12.447,26.472 13.151,26.472 14.7,28.021 v1(14.7,28.1) ; v1(13.536,21.4) 13.536,21.936 13.868,22.268 14.033,22.268 14.578,22.813 D5.2@14.578,22.866 ; C31.1@16.454,10.578 C31.1@16.48,10.604 ; C31.1@17.325,10.355 17.726,10.355 18.08,10 v1(19.2,10) ; J2.6@17.41,7.164 17.5,7.074 v1(17.5,2.6) ; C20.2@17.9,26.2 18.237,26.537 19.433,26.537 v1(20.696,27.8) ; B3.40 19.972,16.404 20.004,16.404 20.243,16.643 20.243,16.772 20.521,17.051 v1(20.521,17.147) ; C28.1@21.674,20.6 24.5,20.6 v1(25,21.1) ; R4.1@23.404,26.921 23.404,26.943 24.461,28 v1(24.5,28) ; R3.1@25.1,26.917 25.763,27.58 25.763,27.963 v1(25.8,28) ; D4.2 27.304,24.304 27.304,25.392 v1(27.296,25.4) ; J4.5@36.826,7.2 37.053,6.973 J4.5@37.053,6.853
  Top Layer w0.254: R5.1@6.9,27 6.9,26.5 6.9,24.869 8.296,23.473 8.296,21.603 9.852,20.047 9.852,19.484 11.911,17.425 B3.20@12.546,17.425 ; B3.11 15.862,20.462 20.7,25.3 22.2,25.3 23.417,26.517 R4.1 ; C31.1 17.117,10.971 16.699,11.389 16.699,11.599 17.402,12.302 17.402,13.3 B3.32
  Top Layer w0.3: B3.10 20.784,24.5 23.3,24.5 24.743,25.943 24.743,26.343 R3.1
  Bottom Layer w0.15: v1(5.442,10.9) v1@5.5,10.9 ; v1@5.512,10.913 v1@5.5,10.9 ; C4.1@5.537,10.337 5.537,10.863 v1@5.5,10.9 ; v1@5.562,10.925 C1.1 ; C1.1@7.688,10.913 C1.1@7.7,10.925 ; C11.1 11.199,18.8 11.274,18.875 11.723,18.875 v1(11.753,18.905) ; C2.1@11.902,14.902 11.904,14.905 v1(11.904,15.342) ; C14.2@14.7,29.225 14.825,29.225 16.4,27.65 ; C3.1 15.574,15.474 v1(15.574,15.488) ; C5.1@15.084,4.203 v1@15.897,4.203 ; C6.1 15.864,4.738 15.864,4.236 v1(15.9,4.2) 15.997,4.2 16.123,4.326 16.226,4.326 C7.1 ; C8.1@15.978,2.6 v1(17.5,2.6) ; C35.1@16.773,23.104 16.773,23.127 16.562,23.338 16.562,23.462 v1(16.9,23.8) ; B4.4@22.1,18.2 22.205,18.095 24.505,18.095 25.132,17.468 25.132,17.068 v1(25.2,17) ; 22.4,29.125 22.525,29.125 ; C33.1 26.291,2.246 26.708,2.663 v1(26.708,2.679) ; C32.1 27.583,5.088 27.926,5.088 28.099,5.261 v1(28.196,5.261) ; 27.875,29.125 28,29.125 ; C17.2@36.967,18 v1(37.9,18)
  other v1: 12.2,9.1 14.1,9.1 24.3,9.7 11.2,9.9 13.1,9.9 23.6,10.8 24.4,11.5 23.5,12 26.2,12.7 26.5,14.1 26.5,15.6 26.5,17 38.1,27.5 23.4,28 6.5,28.1 37.7,28.1 38.6,28.1 6.5,28.8 24.1,28.8 25.2,28.8 38.1,28.8 7.264,28.864 24.6,29.5 25.8,29.5 37.9,31.4 37.5,32 38.4,32 37.9,32.7
GPIO: B1.19 J1.5 | length 23.4
  Top Layer w0.15: J1.5@5.95,15.125 7.075,15.125 7.796,14.404 7.796,9.904 9.821,7.879 17.743,7.879 18.8,6.822 v1(18.8,6.1)
  Bottom Layer w0.15: B1.19@15.31,6.637 15.805,6.141 18.759,6.141 v1(18.8,6.1)
LED1: B1.29 D1.1 | length 10.6
  Top Layer w0.15: D1.1@2.186,7.451 2.222,7.451 2.593,7.079 2.593,6.107 v1(2.6,6.1)
  Bottom Layer w0.15: v1(2.6,6.1) 8.038,6.1 8.416,5.722 10.68,5.722 11.242,6.283 B1.29@11.244,6.283
LED2: B1.28 D2.1 | length 9.5
  Top Layer w0.15: D2.1 4.1,7.112 4.1,6.021 v1(4.5,5.621)
  Bottom Layer w0.15: v1(4.5,5.621) 7.704,5.621 7.903,5.422 10.984,5.422 11.491,5.93 B1.28@11.597,5.93
LX: B2.8 L1.1
MASTER_CS: B1.17 J1.4 | length 26.9
  Top Layer w0.15: J1.4@5.95,16.625 7.095,16.625 7.322,16.397 7.322,15.978 7.56,15.74 7.562,15.74 7.796,15.505 7.796,15.504 8.096,15.204 8.096,10.104 10.021,8.179 18.942,8.179 v1(20.55,6.571)
  Bottom Layer w0.15: B1.17@16.017,7.344 16.482,6.879 20.18,6.879 20.488,6.571 v1(20.55,6.571)
MASTER_MISO: B1.27 J1.2 | length 27.7
  Top Layer w0.15: v1(1.9,13.3) 1.9,16.5 4.964,19.564 5.953,19.564 J1.2@7.25,19.625 ; v1(5,12.4) 5,11.135 4.963,11.098 4.963,9.506 5.1,9.369 v1(5.1,5.1)
  Bottom Layer w0.15: v1(1.9,13.3) 3.024,13.3 3.924,12.4 v1(5,12.4) ; v1(5.1,5.1) 11.475,5.1 B1.27@11.951,5.576
MASTER_MOSI: B1.33 J1.3 | length 19.6
  Top Layer w0.15: v1(2.6,12.8) 2.65,12.85 2.65,15.35 4.978,17.678 4.978,17.897 5.245,18.165 J1.3
  Bottom Layer w0.15: v1(2.6,12.8) 2.6,9 4.8,6.8 6.8,6.8 7.521,7.521 9.596,7.521 9.773,7.697 B1.33@9.83,7.697
MASTER_SCK: B1.6 J1.1 | length 27.8
  Top Layer w0.15: J1.1@5.95,21.125 8.175,21.125 9.5,19.8 v1(9.5,17.2) ; v1(20.922,15.463) 20.99,15.395 20.99,15.019 21.1,14.909 v1(21.1,13.1)
  Bottom Layer w0.15: v1(9.5,17.2) 9.5,16.623 10.161,15.961 13.253,15.961 13.258,15.967 15.888,15.967 16.354,15.5 20.885,15.5 v1(20.922,15.463) ; B1.6@15.416,11.863 16.653,13.1 v1(21.1,13.1)
MOTOR1: B1.8 B3.34 | length 7.1
  Top Layer w0.15: B3.34 19.555,12.561 19.555,11.745 v1(19.6,11.7)
  Bottom Layer w0.15: B1.8@16.124,11.156 16.163,11.156 16.807,11.8 19.333,11.8 19.365,11.768 19.532,11.768 v1(19.6,11.7)
MOTOR2: B1.9 B3.36 | length 8.2
  Top Layer w0.15: B3.36@18.713,14.787 18.969,14.787 19.855,13.901 19.855,12.419 20.079,12.195 20.079,11.502 20.069,11.492 20.069,11.152 v1(20.001,11.084)
  Bottom Layer w0.15: B1.9@16.489,10.791 16.489,10.821 16.837,11.169 19.734,11.169 19.751,11.152 19.932,11.152 v1(20.001,11.084)
MOTOR3: B1.10 B3.38 | length 9.7
  Top Layer w0.15: B3.38@19.374,15.5 19.942,14.932 19.942,14.238 20.2,13.981 20.2,12.498 20.48,12.218 20.48,10.22 v1(20.5,10.2)
  Bottom Layer w0.15: B1.10@16.831,10.449 16.928,10.449 17.083,10.605 20.095,10.605 v1(20.5,10.2)
MOTOR_ENABLE: B1.3 B3.30 | length 21.3
  Top Layer w0.15: B3.30 15.4,12.752 15.4,10.6 16.6,9.4 v1(18.6,9.4) ; v1(20.483,14.57) 20.5,14.553 20.5,12.623 20.979,12.144 20.979,9.427 v1(21.003,9.403)
  Bottom Layer w0.15: B1.3@14.249,12.824 16.025,14.6 20.453,14.6 v1(20.483,14.57) ; v1(18.6,9.4) 18.631,9.431 20.975,9.431 v1(21.003,9.403)
MOTOR_HIZ: B1.4 B3.35 B3.37 B3.39 | length 9.6
  Top Layer w0.15: B3.35 17.915,14.909 17.911,14.913 17.911,15.086 18.469,15.644 18.594,15.644 ; B3.35@18.374,14.5 18.579,14.5 v1(19.2,13.879) ; B3.37 18.594,15.644 ; B3.39 19.567,16.042 19.33,16.28 19.105,16.28 18.594,15.769 18.594,15.644
  Bottom Layer w0.15: B1.4@14.603,12.47 16.011,13.879 v1(19.2,13.879)
NetB2_3: B2.3 C10.2 | length 3.7
  Bottom Layer w0.15: B2.3 10.391,23.466 10.391,23.816 12.096,25.521 12.096,25.734 12.387,26.025 C10.2
NetB2_5: B2.5 JU1.2 | length 1.2
  Bottom Layer w0.15: B2.5 10.9,21.55 JU1.2@12.05,21.55
NetB3_2: B3.2 B3.3 C27.2 C29.2 | length 5.8
  Top Layer w0.254: B3.3 B3.2 19.72,17.779 19.88,17.779 20.319,18.218 21.033,18.218 21.104,18.148 21.622,18.148 22.029,18.554 24.426,18.554 C29.2
NetD1_2: D1.2 R1.1 | length 3.9
  Top Layer w0.15: v1(1.5,9.9) 1.5,9.853 2.358,8.995 D1.2
  Bottom Layer w0.15: R1.1@1.5,7.3 v1(1.5,9.9)
NetD2_2: D2.2 R2.1 | length 6.4
  Top Layer w0.15: D2.2@4.19,9.069 4.3,9.179 v1(4.3,10.038)
  Bottom Layer w0.15: v1(4.3,10.038) 4.368,10.106 4.368,10.504 5.77,11.906 5.77,14.795 R2.1
NRST: B1.7 C8.2 J2.4 | length 24.8
  Top Layer w0.15: v1(14.4,2.742) 14.41,2.752 J2.4@14.41,7.164 ; v1(18.8,4.4) 18.868,4.468 19.125,4.468 21.534,6.878 21.534,9.487 21.5,9.521 v1(21.5,11.5)
  Bottom Layer w0.15: v1(14.4,2.742) 14.458,2.8 15.302,2.8 15.602,3.1 C8.2 16.436,3.1 16.444,3.092 18.492,3.092 18.8,3.4 v1(18.8,4.4) ; B1.7@15.77,11.51 16.46,12.2 20.2,12.2 20.9,11.5 v1(21.5,11.5)
SHA: B3.7 Q1.1 Q1.2 Q1.3 Q2.5 Q2.6 Q2.7 Q2.8 X1.1 | length 24.1
  Top Layer w0.3: B3.7 19.106,20.7 19.106,20.706 20.9,22.5 27.864,22.5 30.1,24.736 30.1,34.4
SHB: B3.14 Q3.1 Q3.2 Q3.3 Q4.5 Q4.6 Q4.7 Q4.8 X2.1 | length 25.5
  Top Layer w0.3: B3.14 14.09,20.148 14.09,21.638 14.327,21.875 14.423,21.875 15.85,23.302 15.85,32.674 16.276,33.1 17.599,33.1 17.775,33.276 Q3.3 17.775,33.841 18.73,34.797 18.73,34.147 ; Q3.2 18.425,33.841 18.73,34.147 ; Q3.1 19.075,33.841 20,34.767 20,35.417 ; X2.1@20,37.475 20,35.417 ; 18.73,34.147 20,35.417
SHC: B3.17 Q5.1 Q5.2 Q5.3 Q6.5 Q6.6 Q6.7 Q6.8 X3.1 | length 21.4
  Top Layer w0.254: X3.1@10.228,37.723 9.704,37.199 9.704,22.541 10.69,21.555 10.931,21.555 11.632,20.854 11.632,20.485 12.864,19.252 B3.17
SPA: B3.9 C24.1 Q2.1 Q2.2 Q2.3 R3.2 | length 12.6
  Top Layer w0.3: B3.9 20.791,23.8 24,23.8 26.343,26.143 26.461,26.143 26.9,26.581 R3.2
SPB: B3.12 C25.1 Q4.1 Q4.2 Q4.3 R4.2 | length 9.6
  Top Layer w0.254: B3.12 15.509,20.152 15.21,20.451 15.21,20.661 20.853,26.304 21.157,26.304 21.617,26.764 R4.2
SPC: B3.19 C26.1 Q6.1 Q6.2 Q6.3 R5.2 | length 11.9
  Top Layer w0.254: R5.2@8.257,27.143 8.7,26.7 8.7,21.771 10.256,20.215 10.256,19.652 11.804,18.104 12.598,18.104 B3.19
SWCLK: B1.37 J2.3 | length 22.5
  Top Layer w0.15: v1(6.4,1.1) 6.4,8.837 7.32,9.757 v1(7.32,9.784) ; v1(12.9,2.7) 12.91,2.71 J2.3@12.91,7.264
  Bottom Layer w0.15: v1(6.4,1.1) 8.221,2.921 11.598,2.921 11.819,2.7 v1(12.9,2.7) ; v1(7.32,9.784) 7.336,9.8 7.363,9.8 8.575,9.73 B1.37@8.769,9.642
SWDIO: B1.36 J2.5 | length 20.3
  Top Layer w0.15: v1(6.879,3) 6.879,8.09 v1(7.663,8.874) ; J2.5 15.921,5.102 16.134,4.888 16.134,4.872 16.642,4.364 v1(16.642,3.571)
  Bottom Layer w0.15: v1(6.879,3) 6.947,3.068 7.281,3.068 7.433,3.221 15.298,3.221 15.608,3.53 16.602,3.53 v1(16.642,3.571) ; v1(7.663,8.874) 8.575,8.67 B1.36@8.769,8.758
UART1_FLOW: B1.30 J4.4 | length 41.5
  Top Layer w0.15: v1(8.614,6.201) 8.647,6.168 8.647,4.377 9.7,3.324 v1(9.7,2) ; v1(20.495,2.835) 21.13,2.2 32.2,2.2 v1(32.7,2.7) ; v1(33.8,9) 33.897,9 34.097,9.2 J4.4
  Bottom Layer w0.15: v1(8.614,6.201) 10.452,6.201 B1.30 ; v1(9.7,2) 9.737,1.963 19.663,1.963 v1@20.5,2.8 ; v1(32.7,2.7) 33.357,3.357 ccw(c32.675,4.188) 33.445,3.438 33.707,3.706 33.75,3.75 33.75,8.95 v1(33.8,9)
UART1_RX: B1.32 J4.2 | length 45.9
  Top Layer w0.15: v1(9.126,7.042) 9.126,4.374 10.3,3.2 v1(10.3,0.9) ; v1(20.5,1) 32.7,1 34.1,2.4 34.1,5.171 v1@34.526,5.597 ; v1(35.104,13.28) 35.144,13.24 37.36,13.24 J4.2
  Bottom Layer w0.15: v1(9.126,7.042) 9.881,7.042 B1.32@10.183,7.344 ; v1(10.3,0.9) 10.35,0.95 20.45,0.95 v1(20.5,1) ; v1(34.529,5.6) 34.529,6.535 35.104,7.11 v1(35.104,13.28)
UART1_TX: B1.31 J4.3 | length 45.6
  Top Layer w0.15: v1(8,6.921) 8,4.6 9.221,3.379 9.221,1.421 v1(9.2,1.4) ; v1(20.5,1.9) 32.519,1.9 32.595,1.976 v1(32.692,1.976) ; v1(34.4,11.2) J4.3
  Bottom Layer w0.15: v1(8,6.921) 8.016,6.937 8.554,6.937 8.928,6.563 10.109,6.563 B1.31@10.537,6.99 ; v1(9.2,1.4) 20,1.4 v1(20.5,1.9) ; v1(32.692,1.976) 32.7,1.976 34.05,3.326 34.05,6.48 34.4,6.83 v1(34.4,11.2)
VCC: B2.1 B2.2 B3.4 B3.5 C9.2 C14.1 C15.1 C16.1 C17.1 C18.1 C19.1 C20.1 C21.1 C22.1 C23.1 C24.2 C25.2 C26.2 C27.1 C28.2 C37.1 D3.1 J3.2 Q1.5 Q1.6 Q1.7 Q1.8 Q3.5 Q3.6 Q3.7 Q3.8 Q5.5 Q5.6 Q5.7 Q5.8 | length 3.5
  Top Layer w0.15: C28.2 C28.2@19.994,19.413 ; C27.1@22.536,19.413 C27.1 C27.1@22.894,19.385
  Top Layer w0.254: C21.1 C21.1@12.18,28.575
  Top Layer w0.3: C28.2@19.994,19.413 20.018,19.39 20.366,19.39 20.73,19.754 21.885,19.754 22.226,19.413 C27.1@22.536,19.413
  other v1: 30.8,8.7 31.6,9.3 30.8,9.8 31.6,10.3 30.8,10.7 31.6,11.3 30.8,11.7 31.6,12.2 29.3,16.8 31.6,20.9 32.4,20.9 33.2,20.9 34.7,20.9 35.5,20.9 32,21.5 32.8,21.5 33.7,21.5 35.1,21.5 31.239,21.515 31.6,22.2 32.4,22.2 33.2,22.2 34.7,22.2 35.5,22.2 33.2,22.9 34,22.9 35.5,22.9 28.5,25.3 34.3,28 34.3,29.2 2.2,30.7 11.7,31 12.5,31 13.3,31 17.3,31 18.1,31 18.9,31 31.6,31 32.4,31 33.2,31 3.1,31.2 12.1,31.6 12.9,31.6 13.8,31.6 17.7,31.6 18.5,31.6 19.4,31.6 32,31.6 32.8,31.6 33.7,31.6 11.339,31.615 16.939,31.615 31.239,31.615 2.2,31.7 11.7,32.3 12.5,32.3 13.3,32.3 17.3,32.3 18.1,32.3 18.9,32.3 31.6,32.3 32.4,32.3 33.2,32.3 3.1,32.4
pads on no net: B1.12 B1.13 B1.15 B1.22 B1.24 B1.25 B1.34 B1.38 B1.41 B1.42 B1.44 B1.45 B1.46 B1.47 B2.6 B3.31 B4.3 B4.5 J1.7 J1.8 J2.1 J2.7 J2.8 J3.3 J3.4

## Polygon pours and split planes (outlines as drawn)
+3.3V on Bottom Layer "NONET_L-01_P-001" (solid, remove dead copper, pour order 1): 0,40.8 41.5,40.8 41.5,0.7 40.8,0 0,0 0,40.5
+3.3V on Top Layer "+3.3V_L01_P002" (solid, pour order 2): 39.7,20.1 22.8,20.1 22.8,18.8 16.8,12.8 11.7,17.9 11.7,21.39 8.59,24.5 0.6,24.5 0.6,0.7 0.7,0.6 39.7,0.6
no net on Top Overlay "NONET_L01_P-001" (none): 32.9,16.7 37.9,16.7 38.9,15.7 38.9,6.6 38.2,5.9 33.4,5.9 32.9,6.4